# Altium PCB PCB_ProtoDuck_v1_2026-05-04.pcbdoc (part 1 of 2)
Units mm, origin at the board's own origin, x right, y up, seen from the top; angles counter-clockwise.
Board outline 75.65 x 110.65 mm, 2 copper layers (Top Layer, Bottom Layer); 76 components, 84 nets, 372 pads, 186 vias.
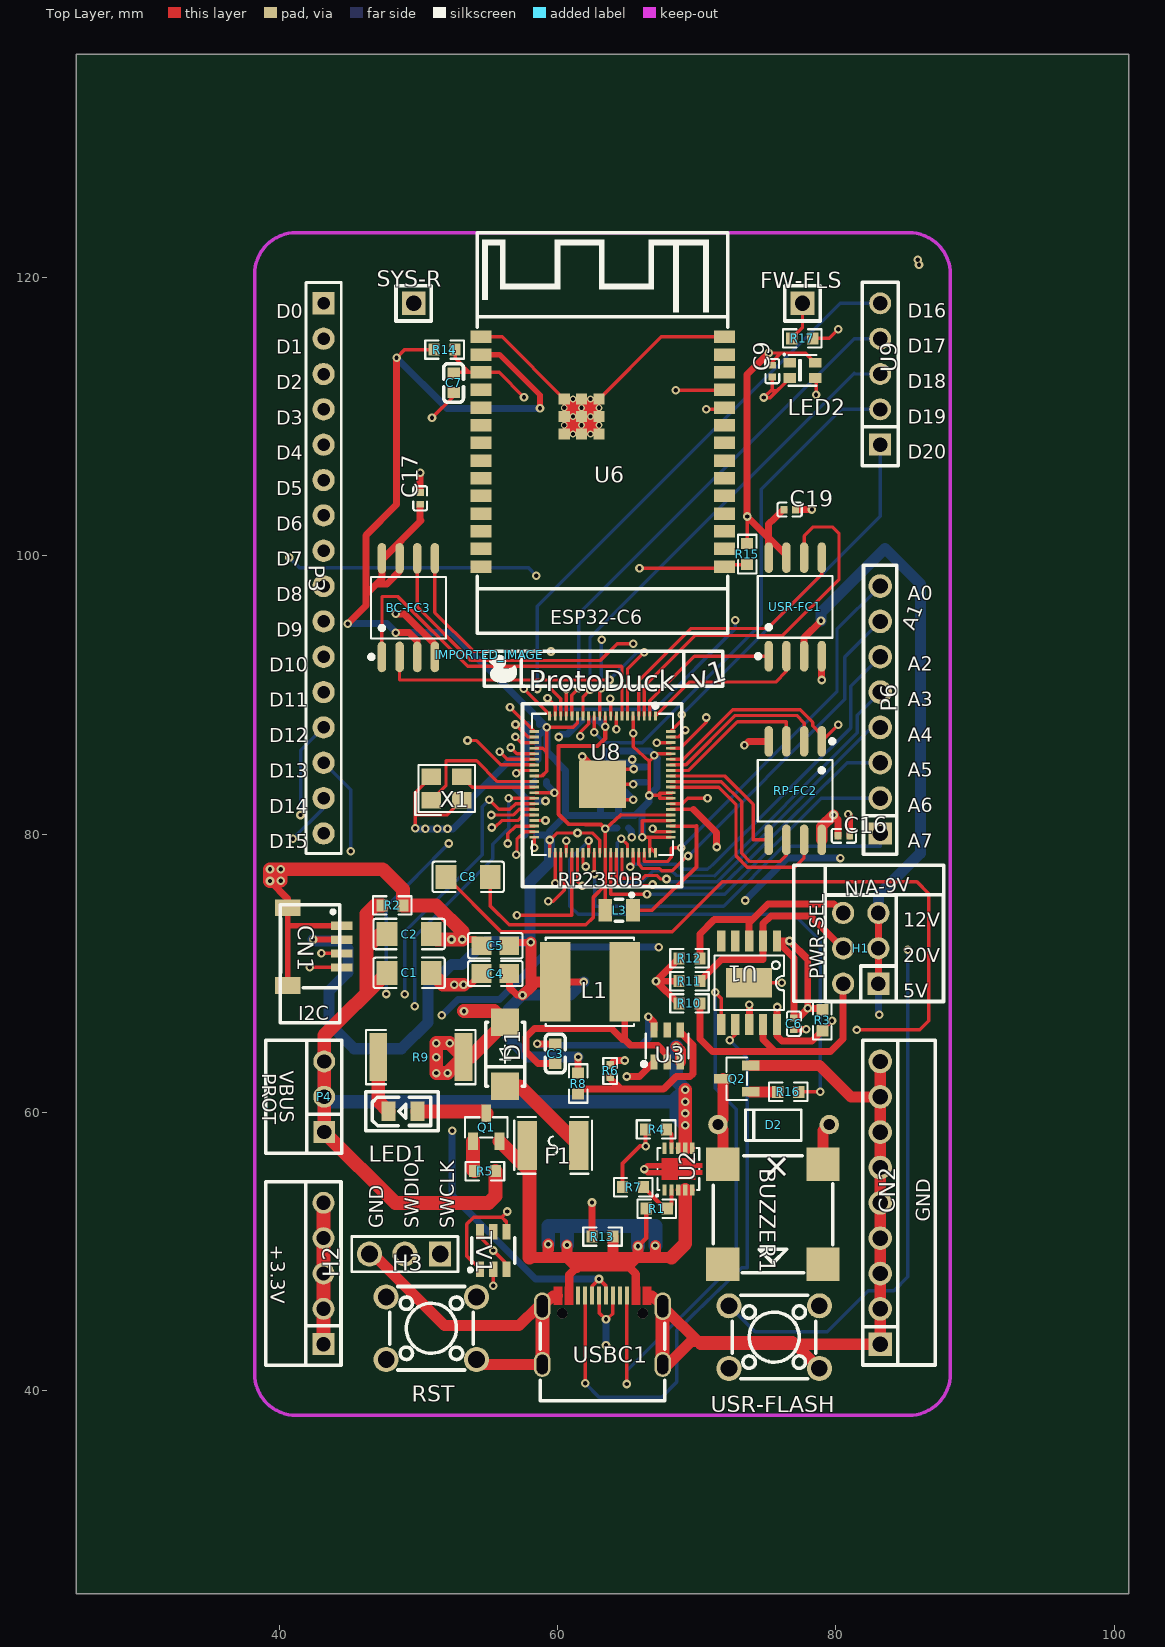
[diagram p0: Top Layer view]
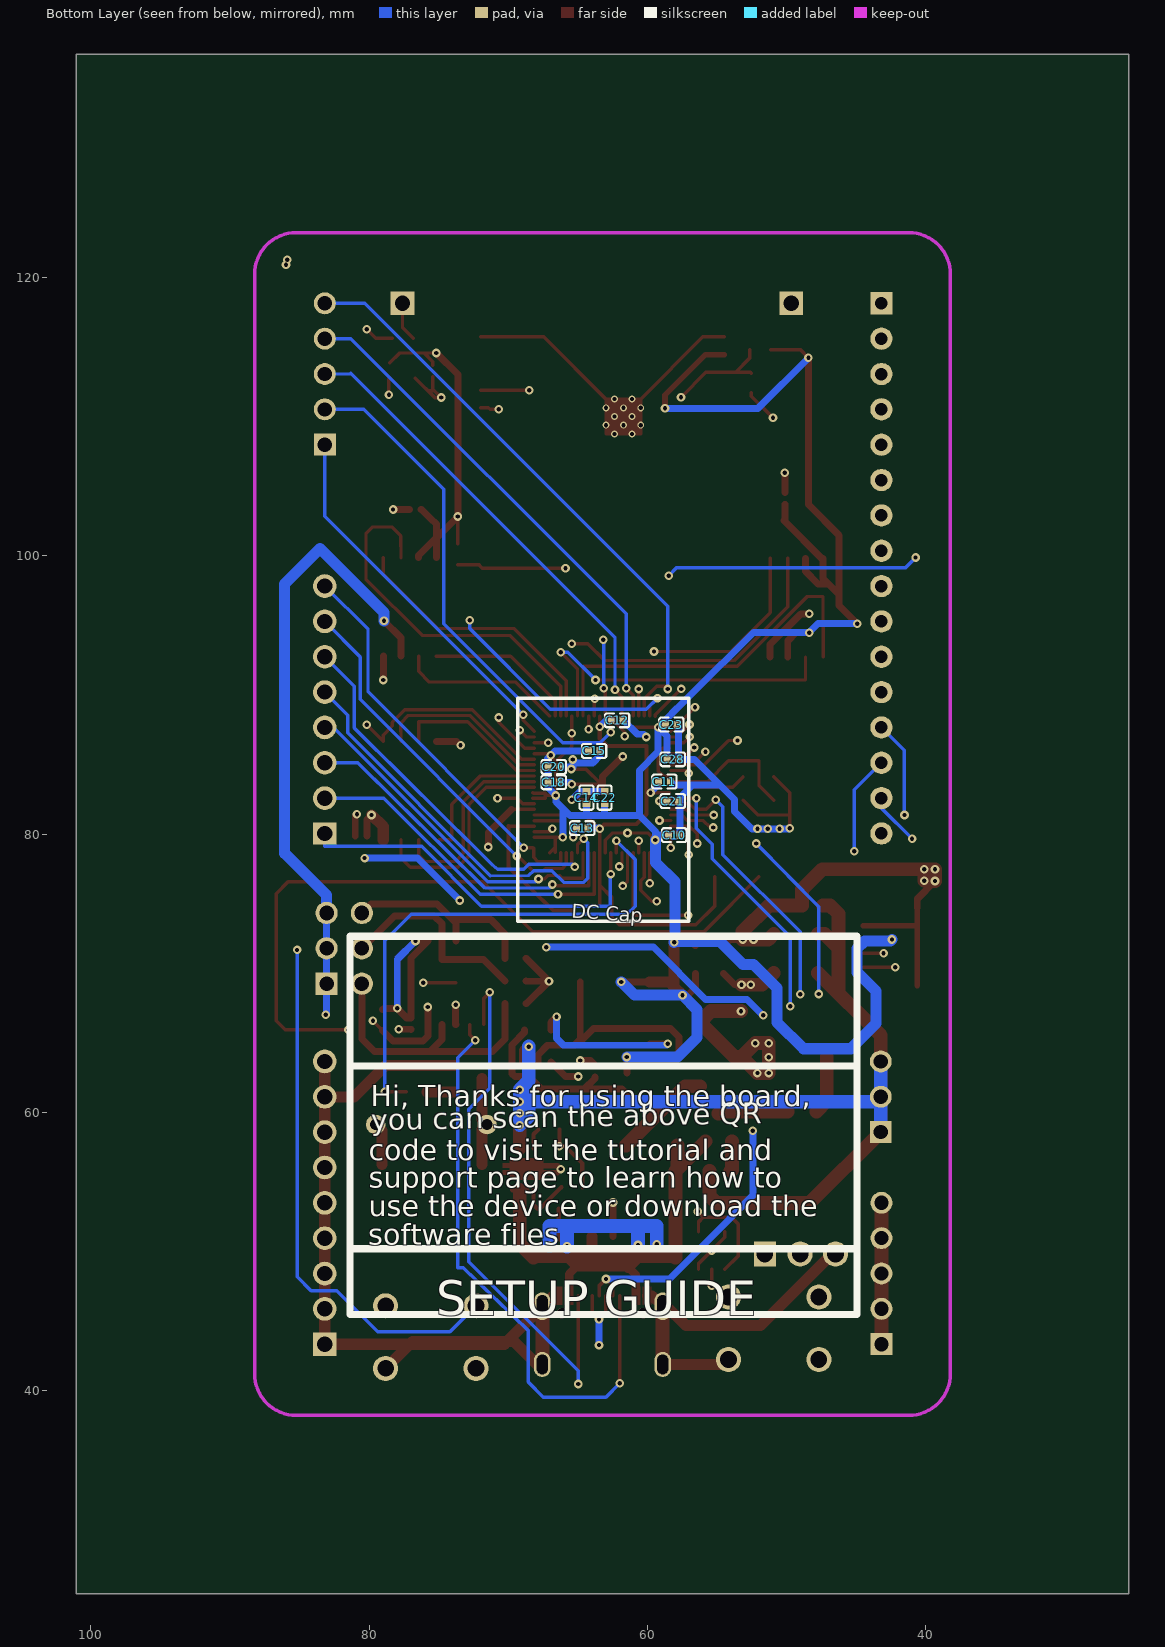
[diagram p1: Bottom Layer view, seen from below]

## Layer stack, top to bottom
Top Layer: signal copper (thickness not stored)
Dielectric: dielectric 0.32, FR-4, Dk 4.8
Bottom Layer: signal copper (thickness not stored)

## Board outline
101.054,25.4 25.4,25.4 25.4,136.054 101.054,136.054

## Components (designator, comment, footprint, x,y, rotation, side; value= is the part's Value field where it differs from the comment)
BC-FC3 "GD25Q128ESIGR" SOP-8_L5.3-W5.3-P1.27-LS8.0-BL 49.277,96.277 r0 top
BUZZER1 "2700Hz" BUZ-SMD_4P-L8.5-W8.5-P8.50-TL 75.477,52.677 r270 top
C1 "10uF" C1206 49.327,70.027 r180 top
C2 "10uF" C1206 49.327,72.821 r180 top
C3 "100nF" C0603 59.827,64.227 r90 top
C4 "22uF" C0805 55.527,69.977 r0 top
C5 "22uF" C0805 55.527,71.977 r0 top
C6 "100nF" C0402#1 76.977,66.377 r90 top
C7 "1uF" C0603 52.527,112.427 r270 top
C8 "10uF" C1206 53.577,76.927 r0 top
C9 "100nF" C0402#1 75.427,113.277 r90 top
C10 "100nF" C0402#2 58.077,79.927 r0 bottom
C11 "100nF" C0402#2 58.777,83.777 r0 bottom
C12 "100nF" C0402#2 62.177,88.177 r0 bottom
C13 "100nF" C0402#2 64.677,80.427 r180 bottom
C14 "100nF" C0402#2 64.377,82.627 r270 bottom
C15 "100nF" C0402#2 63.827,85.977 r0 bottom
C16 "100nF" C0402#1 80.577,79.877 r0 top
C17 "100nF" C0402#1 50.127,104.127 r90 top
C18 "100nF" C0402#2 66.727,83.727 r0 bottom
C19 "100nF" C0402#1 76.677,103.327 r0 top
C20 "100nF" C0402#2 66.727,84.827 r0 bottom
C21 "100nF" C0402#2 58.177,82.377 r0 bottom
C22 "100nF" C0402#2 63.077,82.627 r270 bottom
C23 "100nF" C0402#2 58.277,87.877 r0 bottom
C28 "10uF" C0402#2 58.177,85.377 r0 bottom
CN1 "SM04B-SRSS-TB (LF)(SN)" CONN-SMD_4P-P1.00_SM04B-SRSS-TB-LF-SN 42.545,71.919 r270 top
CN2 "HX PM2.54-1X9P ZC-Y" HDR-TH_9P-P2.54-V-F-1 83.185,53.5 r90 top
D1 "SMAJ22A_C51045908" DO-214AC_L4.3-W2.7-LS5.3-RD 56.227,64.177 r90 top
D2 "1N4148_C18195411" DO-35_BD2.2-L4.0-D0.50_1N4148 75.527,59.127 r180 top
F1 "JK-MSMD050-30" F1812 59.677,57.627 r0 top
FW-FLS "Header-Male-2.54_1x1" HDR-TH_1P-P2.54-V-M 77.597,118.147 r0 top
H1 "2.54-2*3" HDR-TH_6P-P2.54-V-R2-C3-S2.54_A2541WV-2X3P 81.788,71.792 r90 top
H2 "Header-Female-2.54_1x5" HDR-TH_5P-P2.54-V-F 43.18,48.424 r90 top
H3 "Header-Male-2.54_1x3" HDR-TH_3P-P2.54-V-M-1 49.022,49.821 r180 top
IMPORTED_IMAGE "IMPORTED_IMAGE" IMPORTED_IMAGE 55.082,92.878 r0 top
L1 "4.7uH" IND-SMD_L6.0-W6.0 62.327,69.377 r180 top
L3 "3.3uH" IND-SMD_L2.0-W1.6_AOTA-B201610S3R3-101-T 64.427,74.527 r0 top
LED1 "17-21VRD/TR8" LED0805-R-RD 48.889,60.076 r0 top
LED2 "WS2812C-2020-V1" LED-SMD_4P-L2.0-W2.0-TL_WS2812B-2020 77.598,113.322 r0 top
P3 "Header-Female-2.54_1x16" HDR-TH_16P-P2.54-V-F-1 43.18,99.097 r270 top
P4 "Header-Female-2.54_1x3" HDR-TH_3P-P2.54-V-F 43.227,61.124 r90 top
P6 "Header-Female-2.54_1x8" HDR-TH_8P-P2.54-V-F 83.185,88.937 r90 top
Q1 "MMBT3906_C51953475" SOT-23-3_L2.9-W1.3-P1.90-LS2.4-BR 54.877,58.927 r270 top
Q2 "S8050_C51953468" SOT-23-3_L2.9-W1.3-P1.90-LS2.4-BR 72.877,62.427 r0 top
R1 "47kΩ" R0603 67.127,53.077 r180 top
R2 "10kΩ" R0603 48.127,74.877 r180 top
R3 "10kΩ" R0603 79.027,66.627 r90 top
R4 "33kΩ" R0603 67.077,58.777 r0 top
R5 "100kΩ" R0603 54.777,55.777 r0 top
R6 "22kΩ" R0402 63.777,62.977 r90 top
R7 "20kΩ" R0603 65.427,54.627 r0 top
R8 "100kΩ" R0603 61.477,62.077 r90 top
R9 "1.5kΩ" R2512 50.177,63.977 r180 top
R10 "10kΩ" R0603 69.477,67.827 r0 top
R11 "10kΩ" R0603 69.477,69.432 r0 top
R12 "10kΩ" R0603 69.477,71.077 r0 top
R13 "1kΩ" R0603 63.227,51.077 r0 top
R14 "10kΩ" R0603 51.877,114.827 r0 top
R15 "10kΩ" R0603 73.627,100.127 r270 top
R16 "1kΩ" R0603 76.577,61.477 r0 top
R17 "1kΩ" R0603 77.577,115.627 r0 top
RP-FC2 "GD25Q128ESIGR" SOP-8_L5.3-W5.3-P1.27-LS8.0-BL 77.077,83.127 r180 top
RST "TS665CJ" SW-TH_4P-L6.0-W6.0-P4.50-LS6.5 50.927,44.487 r0 top
SYS-R "Header-Male-2.54_1x1" HDR-TH_1P-P2.54-V-M 49.657,118.147 r0 top
TV1 "SRV05-4-P-T7" SOT-23-6_L2.9-W1.6-P0.95-LS2.8-BR 55.377,50.077 r270 top
U1 "CH224K" ESSOP-10_L4.9-W3.9-P1.0-LS6.0-TL-EP 73.767,69.317 r180 top
U2 "TPS259271DRCR" VSON-10_L3.0-W3.0-P0.50-TL-EP 68.677,55.927 r90 top
U3 "TPS54302DDCR_C311983" SOT-23-6_L2.9-W1.6-P0.95-LS2.8-BL 67.877,64.777 r0 top
U6 "ESP32-C6-WROOM-1-N8" WIRELM-SMD_ESP32-C6-WROOM-1 63.233,107.477 r0 top
U8 "RP2350B_C42415655" QFN-80_L10.0-W10.0-P0.40-TL-EP3.4 63.227,83.577 r270 top
U9 "BX-PM2.54-1-5PY" HDR-TH_5P-P2.54-V-F-B 83.185,113.067 r90 top
USBC1 "TYPE-C-31-M-12" USB-C_SMD-TYPE-C-31-M-12_1 63.227,44.36 r0 top
USR-FC1 "GD25Q128ESIGR" SOP-8_L5.3-W5.3-P1.27-LS8.0-BL 77.077,96.327 r0 top
USR-FLASH "TS665CJ" SW-TH_4P-L6.0-W6.0-P4.50-LS6.5 75.565,43.852 r0 top
X1 "12MHz" CRYSTAL-SMD_4P-L3.2-W2.5-BL 52.027,83.277 r0 top

## Footprints (in the part's own frame and the unit in brackets; to place one, negate y for a bottom-side part, rotate by r counter-clockwise, add the part's x,y. Pads: shape width x height; smd on the part's side, far side on the other; paste and mask are expansions set on the pad)
BUZ-SMD_4P-L8.5-W8.5-P8.50-TL [mm]
  rect 2.4x2.4 smd paste+0 mask+0.051: 1(-3.6,3.6) 2(-3.6,-3.6) 3(3.599,-3.6) 4(3.6,3.6)
  silkscreen extent -4.2,-4.3 4.2,4.3
C0402#1 [mm]
  rect 0.5x0.54 smd paste+0 mask+0.051: 1(-0.42,0) 2(0.42,0)
  silkscreen extent -0.87,-0.5 0.87,0.5
C0402#2 [mm]
  rect 0.5x0.54 smd paste+0 mask+0.051: 1(0.42,0) 2(-0.42,0)
  silkscreen extent -0.87,-0.5 0.87,0.5
C0603 [mm]
  rect 0.8x0.9 smd paste+0 mask+0.051: 1(-0.7,0) 2(0.7,0)
  silkscreen extent -1.39,-0.71 1.39,0.71
C0805 [mm]
  rect 1.41x1.35 smd paste-100 mask+0.051: 1(-1,0) 2(1,0)
  silkscreen extent -1.96,-0.9 1.96,0.9
C1206 [mm]
  rect 1.485x1.728 smd paste-100 mask+0.051: 1(-1.593,0) 2(1.593,0)
  silkscreen extent -2.56,-1.09 2.56,1.09
CONN-SMD_4P-P1.00_SM04B-SRSS-TB-LF-SN [mm]
  rect 0.6x1.55 smd paste+0 mask+0.051: 1(-1.5,1.938) 2(-0.5,1.938) 3(0.501,1.938) 4(1.5,1.938)
  rect 1.2x1.8 smd paste+0 mask+0.051: 5(2.8,-1.938) 6(-2.8,-1.938)
  silkscreen extent -3.02,-2.46 2.96,1.8
CRYSTAL-SMD_4P-L3.2-W2.5-BL [mm]
  rect 1.4x1.2 smd paste+0 mask+0.051: 1(-1.1,-0.85) 2(1.1,-0.85) 3(1.1,0.85) 4(-1.1,0.85)
  silkscreen extent -2.26,-1.91 2.03,1.68
DO-35_BD2.2-L4.0-D0.50_1N4148 [mm]
  round 1.4 hole 0.8 paste+0 mask+0.05: 1(-4,0) 2(4,0)
  silkscreen extent -1.98,-1.06 2.02,1.14
DO-214AC_L4.3-W2.7-LS5.3-RD [mm]
  rect 2x2 smd paste+0 mask+0.051: 1(-2.3,0) 2(2.3,0)
  silkscreen extent -2.3,-1.4 2.3,1.4
ESSOP-10_L4.9-W3.9-P1.0-LS6.0-TL-EP [mm]
  rect 0.6x1.5 smd paste+0 mask+0.05: 1(-2,-3) 2(-1,-3) 3(0,-3) 4(1,-3) 5(2,-3) 6(2,3) 7(1,3) 8(0,3) 9(-1,3) 10(-2,3)
  rect 3.3x2.1 smd paste+0 mask+0.05: 11(0,0)
  silkscreen extent -2.5,-1.95 2.5,1.95
F1812 [mm]
  rect 1.407x3.499 smd paste-100 mask+0.051: 1(-1.853,0) 2(1.853,0)
  silkscreen extent -2.79,-2.03 2.79,2.03
HDR-TH_1P-P2.54-V-M [mm]
  rect 1.7x1.7 hole 1.1 paste+0 mask+0.051: 1(0,0)
  silkscreen extent -1.27,-1.27 1.27,1.27
HDR-TH_3P-P2.54-V-F [mil]
  rect 62x62 hole 40.16 paste+0 mask+2: 1(-100,0)
  round 62 hole 40.16 paste+0 mask+2: 2(0,0) 3(100,0)
  silkscreen extent -160,-49 160,49
HDR-TH_3P-P2.54-V-M-1 [mm]
  rect 1.575x1.8 hole 1.2 paste+0 mask+0.051: 1(-2.54,0)
  round 1.8 hole 1.2 paste+0 mask+0.051: 2(0,0) 3(2.54,0)
  silkscreen extent -3.81,-1.27 3.81,1.27
HDR-TH_5P-P2.54-V-F [mil]
  rect 62x62 hole 40.16 paste+0 mask+2: 1(-200,0)
  round 62 hole 40.16 paste+0 mask+2: 2(-100,0) 3(0,0) 4(100,0) 5(200,0)
  silkscreen extent -260,-50 260,50
HDR-TH_5P-P2.54-V-F-B [mil]
  rect 62x62 hole 40.16 paste+0 mask+2: 1(-200,0)
  round 62 hole 40.16 paste+0 mask+2: 2(-100,0) 3(0,0) 4(100,0) 5(200,0)
  silkscreen extent -260,-51 260,51
HDR-TH_6P-P2.54-V-R2-C3-S2.54_A2541WV-2X3P [mm]
  rect 1.6x1.6 hole 1.05 paste+0 mask+0.051: 1(-2.54,-1.27)
  round 1.6 hole 1.05 paste+0 mask+0.051: 2(-2.54,1.27) 3(0,-1.27) 4(0,1.27) 5(2.54,-1.27) 6(2.54,1.27)
  silkscreen extent -3.81,-2.54 3.81,2.54
HDR-TH_8P-P2.54-V-F [mm]
  rect 1.575x1.7 hole 1.1 paste+0 mask+0.051: 1(-8.89,0)
  round 1.7 hole 1.1 paste+0 mask+0.051: 2(-6.35,0) 3(-3.81,0) 4(-1.27,0) 5(1.27,0) 6(3.81,0) 7(6.35,0) 8(8.89,0)
  silkscreen extent -10.4,-1.2 10.4,1.2
HDR-TH_9P-P2.54-V-F-1 [mm]
  rect 1.7x1.7 hole 1.1 paste+0 mask+0.051: 1(-10.16,0)
  round 1.7 hole 1.1 paste+0 mask+0.051: 2(-7.62,0) 3(-5.08,0) 4(-2.54,0) 5(0,0) 6(2.54,0) 7(5.08,0) 8(7.62,0) 9(10.16,0)
  silkscreen extent -11.68,-1.25 11.68,1.25
HDR-TH_16P-P2.54-V-F-1 [mm]
  rect 1.6x1.6 hole 0.9 paste+0 mask+0.051: 1(-19.05,0)
  round 1.6 hole 0.9 paste+0 mask+0.051: 2(-16.51,0) 3(-13.97,0) 4(-11.43,0) 5(-8.89,0) 6(-6.35,0) 7(-3.81,0) 8(-1.27,0) 9(1.27,0) 10(3.81,0) 11(6.35,0) 12(8.89,0) 13(11.43,0) 14(13.97,0) 15(16.51,0) 16(19.05,0)
  silkscreen extent -20.55,-1.27 20.5,1.27
IMPORTED_IMAGE [mm]
  silkscreen extent 0,-2 2,0
IND-SMD_L2.0-W1.6_AOTA-B201610S3R3-101-T [mm]
  rect 1x1.6 smd paste+0 mask+0.05: 1(-1,0) 2(1,0)
  silkscreen extent -0.27,-0.8 1.03,1.23
IND-SMD_L6.0-W6.0 [mm]
  rect 2.2x5.72 smd paste+0 mask+0.051: 1(-2.5,0) 2(2.5,0)
  silkscreen extent -3.18,-3.18 3.18,3.18
LED0805-R-RD [mm]
  rect 1x1.4 smd paste+0 mask+0.051: 1(1.05,0) 2(-1.05,0)
  silkscreen extent -2.22,-1.04 1.99,1.01
LED-SMD_4P-L2.0-W2.0-TL_WS2812B-2020 [mm]
  rect 0.9x0.7 smd paste+0 mask+0.051: 1(-0.915,0.55) 2(-0.915,-0.55) 3(0.915,-0.55) 4(0.915,0.55)
  silkscreen extent -1.3,-1.1 1,1.15
QFN-80_L10.0-W10.0-P0.40-TL-EP3.4 [mm]
  rect 0.665x0.2 smd paste+0 mask+0.05: 1(-4.907,3.8) 2(-4.907,3.4) 3(-4.907,3) 4(-4.907,2.6) 5(-4.907,2.2) 6(-4.907,1.8) 7(-4.907,1.4) 8(-4.907,1) 9(-4.907,0.6) 10(-4.907,0.2) 11(-4.907,-0.2) 12(-4.907,-0.6) 13(-4.907,-1) 14(-4.907,-1.4) 15(-4.907,-1.8) 16(-4.907,-2.2) 17(-4.907,-2.6) 18(-4.907,-3) 19(-4.907,-3.4) 20(-4.907,-3.8) 41(4.907,-3.8) 42(4.907,-3.4) 43(4.907,-3) 44(4.907,-2.6) 45(4.907,-2.2) 46(4.907,-1.8) 47(4.907,-1.4) 48(4.907,-1) 49(4.907,-0.6) 50(4.907,-0.2) 51(4.907,0.2) 52(4.907,0.6) 53(4.907,1) 54(4.907,1.4) 55(4.907,1.8) 56(4.907,2.2) 57(4.907,2.6) 58(4.907,3) 59(4.907,3.4) 60(4.907,3.8)
  rect 0.2x0.665 smd paste+0 mask+0.05: 21(-3.8,-4.907) 22(-3.4,-4.907) 23(-3,-4.907) 24(-2.6,-4.907) 25(-2.2,-4.907) 26(-1.8,-4.907) 27(-1.4,-4.907) 28(-1,-4.907) 29(-0.6,-4.907) 30(-0.2,-4.907) 31(0.2,-4.907) 32(0.6,-4.907) 33(1,-4.907) 34(1.4,-4.907) 35(1.8,-4.907) 36(2.2,-4.907) 37(2.6,-4.907) 38(3,-4.907) 39(3.4,-4.907) 40(3.8,-4.907) 61(3.8,4.907) 62(3.4,4.907) 63(3,4.907) 64(2.6,4.907) 65(2.2,4.907) 66(1.8,4.907) 67(1.4,4.907) 68(1,4.907) 69(0.6,4.907) 70(0.2,4.907) 71(-0.2,4.907) 72(-0.6,4.907) 73(-1,4.907) 74(-1.4,4.907) 75(-1.8,4.907) 76(-2.2,4.907) 77(-2.6,4.907) 78(-3,4.907) 79(-3.4,4.907) 80(-3.8,4.907)
  rect 3.4x3.4 smd paste+0 mask+0.05: 81(0,0)
  silkscreen extent -5.81,-5.08 5.08,5.08
R0402 [mm]
  rect 0.566x0.54 smd paste-100 mask+0.051: 1(-0.433,0) 2(0.433,0)
  silkscreen extent -0.94,-0.5 0.94,0.5
R0603 [mm]
  rect 0.806x0.864 smd paste-100 mask+0.051: 1(-0.753,0) 2(0.753,0)
  silkscreen extent -1.39,-0.66 1.39,0.66
R2512 [mm]
  rect 1.283x3.456 smd paste-100 mask+0.051: 1(-3.066,0) 2(3.066,0)
  silkscreen extent -3.94,-1.96 3.94,1.96
SOP-8_L5.3-W5.3-P1.27-LS8.0-BL [mm]
  oval 0.609x2.204 smd paste+0 mask+0.051: 1(-1.905,-3.542) 2(-0.635,-3.542) 3(0.635,-3.542) 4(1.905,-3.542) 5(1.905,3.542) 6(0.635,3.542) 7(-0.635,3.542) 8(-1.905,3.542)
  silkscreen extent -2.81,-3.69 2.69,2.21
SOT-23-3_L2.9-W1.3-P1.90-LS2.4-BR [mm]
  rect 1.25x0.7 smd paste+0 mask+0.051: 1(1,-0.95) 2(1,0.95) 3(-1,0)
  silkscreen extent -0.73,-1.53 0.73,1.53
SOT-23-6_L2.9-W1.6-P0.95-LS2.8-BL [mm]
  rect 0.532x1.072 smd paste+0 mask+0.051: 1(-0.95,-1.149) 2(0,-1.149) 3(0.95,-1.149) 4(0.95,1.149) 5(0,1.149) 6(-0.95,1.149)
  silkscreen extent -1.82,-1.45 1.54,0.89
SOT-23-6_L2.9-W1.6-P0.95-LS2.8-BR [mm]
  rect 1.1x0.6 smd paste+0 mask+0.051: 1(1.35,-0.95) 2(1.35,0) 3(1.35,0.95) 4(-1.35,0.95) 5(-1.35,0) 6(-1.35,-0.95)
  silkscreen extent -0.9,-1.78 1.52,1.55
SW-TH_4P-L6.0-W6.0-P4.50-LS6.5 [mm]
  round 1.8 hole 1.2 paste+0 mask+0.051: 1(-3.25,2.25) 2(3.25,2.25) 3(-3.25,-2.25) 4(3.25,-2.25)
  silkscreen extent -3,-3 3,3
USB-C_SMD-TYPE-C-31-M-12_1 [mm]
  oval 1.2x2 hole 0.8 slot 1.6 at 90 deg paste+0 mask+0.051: 1(4.325,1.706) 4(-4.325,1.706)
  oval 1.2x1.8 hole 0.8 slot 1.4 at 90 deg paste+0 mask+0.051: 2(4.325,-2.474) 3(-4.325,-2.474)
  rect 0.3x1.3 smd paste-100 mask+0.051: A5(-1.25,2.474) A6(-0.25,2.474) A7(0.25,2.474) A8(1.25,2.474) B5(1.75,2.474) B6(0.75,2.474) B7(-0.75,2.474) B8(-1.75,2.474)
  round 0.75 hole 0.75 unplated paste+0: ""(-2.9,1.205) ""(2.9,1.205)
  Top Layer region: -2.9,1.824 -2.9,3.124 -2.9,3.124 -3.2,3.124 -3.2,3.124 -3.2,3.124 -3.2,3.124 -3.5,3.124 -3.5,3.124 -3.5,1.824 -3.5,1.824 -3.2,1.824 -3.2,1.824 -3.2,1.824 -3.2,1.824
  Top Layer region: 2.9,3.124 2.9,1.824 2.9,1.824 3.2,1.824 3.2,1.824 3.2,1.824 3.2,1.824 3.5,1.824 3.5,1.824 3.5,3.124 3.5,3.124 3.2,3.124 3.2,3.124 3.2,3.124 3.2,3.124
  Top Layer region: 2.7,1.824 2.7,3.124 2.7,3.124 2.4,3.124 2.4,3.124 2.4,3.124 2.4,3.124 2.1,3.124 2.1,3.124 2.1,1.824 2.1,1.824 2.4,1.824 2.4,1.824 2.4,1.824 2.4,1.824
  Top Layer region: -2.1,1.824 -2.1,3.124 -2.1,3.124 -2.4,3.124 -2.4,3.124 -2.4,3.124 -2.4,3.124 -2.7,3.124 -2.7,3.124 -2.7,1.824 -2.7,1.824 -2.4,1.824 -2.4,1.824 -2.4,1.824 -2.4,1.824
  silkscreen extent -4.47,-5.09 4.47,0.49
VSON-10_L3.0-W3.0-P0.50-TL-EP [mm]
  rect 0.8x0.3 smd paste+0 mask+0.051: 1(-1.5,1) 2(-1.5,0.5) 3(-1.5,0) 4(-1.5,-0.5) 5(-1.5,-1) 6(1.5,-1) 7(1.5,-0.5) 8(1.5,0) 9(1.5,0.5) 10(1.5,1)
  Top Layer region: -0.758,1.191 -0.398,1.191 -0.398,1.706 -0.098,1.706 -0.098,1.191 0.102,1.191 0.102,1.706 0.402,1.706 0.402,1.191 0.761,1.191 0.761,-1.209 0.402,-1.209 0.402,-1.714 0.102,-1.714 0.102,-1.209 -0.098,-1.209 -0.098,-1.714 -0.398,-1.714 -0.398,-1.209 -0.759,-1.209 -0.759,0.886 -0.758,0.886 -0.758,0.886 -0.758,0.886
  silkscreen extent -1.98,-1.5 1.5,1.6
WIRELM-SMD_ESP32-C6-WROOM-1 [mm]
  rect 1.5x0.9 smd paste+0 mask+0.05: 1(-8.75,8.255) 2(-8.75,6.985) 3(-8.75,5.715) 4(-8.75,4.445) 5(-8.75,3.175) 6(-8.75,1.905) 7(-8.75,0.635) 8(-8.75,-0.635) 9(-8.75,-1.905) 10(-8.75,-3.175) 11(-8.75,-4.445) 12(-8.75,-5.715) 13(-8.75,-6.985) 14(-8.75,-8.255) 15(8.75,-8.255) 16(8.75,-6.985) 17(8.75,-5.715) 18(8.75,-4.445) 19(8.75,-3.175) 20(8.75,-1.905) 21(8.75,-0.635) 22(8.75,0.635) 23(8.75,1.905) 24(8.75,3.175) 25(8.75,4.445) 26(8.75,5.715) 27(8.75,6.985) 28(8.75,8.255)
  rect 0.8x0.8 smd paste+0 mask+0.05: 29(-2.755,3.785) 30(-1.505,3.785) 31(-0.255,3.785) 32(-0.255,2.535) 33(-1.505,2.535) 34(-2.755,2.535) 35(-2.755,1.285) 36(-1.505,1.285) 37(-0.255,1.285)
  silkscreen extent -9,-9.84 9,15.74

## Via types
v1: diameter 0.62, hole 0.31, Top Layer to Bottom Layer, tented both sides, 174 vias
v2: diameter 0.5, hole 0.3, Top Layer to Bottom Layer, tented both sides, 12 vias

## Nets (pads, with @x,y where several pads share a name; then routed paths per layer and width w, separated by ;. In a path a pad name is that pad's centre, name@x,y a point inside that pad or via, vN(x,y) a via of type N, cw(c..) or ccw(c..) an arc to the next point about the centre after c; other vN are vias at no path point)
+3.3V: BC-FC3.3 BC-FC3.7 BC-FC3.8 BUZZER1.1 C4.2 C5.2 C6.2 C9.2 C10.1 C14.1 C15.1 C16.1 C17.1 C18.1 C19.1 C20.1 C21.1 C22.1 C23.1 C28.1 CN1.2 D2.1 H1.1 H1.3 H1.5 H2.1 H2.2 H2.3 H2.4 H2.5 L1.2 LED2.4 R3.2 R8.2 R14.1 R15.1 RP-FC2.8 U1.1 U6.2 U8.5 U8.15 U8.24 U8.29 U8.41 U8.50 U8.59 U8.60 U8.61 U8.64 U8.68 U8.69 U8.76 USR-FC1.3 USR-FC1.7 USR-FC1.8 | length 493.4
  Top Layer w0.23: U8.59@66.627,78.669 66.627,79.777 U8.61@68.135,79.777
  Top Layer w0.24: v1(59.227,87.677) 61.127,87.677 61.427,87.977 U8.15@61.427,88.484 ; v1@59.426,79.577 59.926,80.077 v1(61.427,80.077) 62.528,80.077 62.652,79.953 ; 62.651,79.953 63.027,79.577 U8.50@63.027,78.669 ; v1@66.077,79.777 66.627,79.777 ; 66.576,85.226 67.127,85.777 U8.76@68.135,85.777 ; 66.627,79.064 U8.60@67.027,78.669 ; v1(75.177,114.577) 77.808,114.577 LED2.4@78.513,113.872
  Top Layer w0.25: v1(48.427,114.227) 49.027,114.827 R14.1@51.124,114.827 ; U8.29@58.419,84.177 58.877,84.177 59.227,84.527 59.227,85.877 ; U8.24@58.419,86.177 58.927,86.177 59.227,85.877 ; v1(59.227,87.677) 59.227,85.877 ; U8.41@59.427,78.677 v1(59.427,79.577) ; U8.5@65.427,88.484 v1(65.427,87.258) 65.427,86.277 66.576,85.226 v1(66.577,82.777) ; v1@66.078,79.778 66.078,80.976 U8.64@68.135,80.976 ; v1(66.577,82.777) 67.295,82.777 67.327,82.745 ; U8.68@68.235,82.577 67.327,82.577 67.327,82.927 68.185,82.927 U8.69@68.235,82.977 ; R15.1@73.627,100.88 v1(73.627,102.827) ; C9.2@75.427,113.697 75.427,113.952 76.051,114.577
  Top Layer w0.4: v1@42.427,72.427 44.475,72.427 CN1.2@44.483,72.419 ; U6.2@54.483,114.462 55.826,114.462 58.733,111.554 v1(58.733,110.604)
  Top Layer w0.5: v1(44.927,95.127) 46.227,96.427 46.227,101.477 48.427,103.677 v1(48.427,114.227) ; 46.227,97.22 46.984,97.977 ; v1(48.377,94.477) 49.327,94.477 49.912,93.892 BC-FC3.3@49.912,92.735 ; BC-FC3.7@48.642,99.819 48.642,98.892 47.727,97.977 46.984,97.977 ; C17.1@50.127,103.707 50.127,102.577 50.177,102.527 47.469,99.819 BC-FC3.8@47.372,99.819 47.372,98.365 46.984,97.977 ; C4.2@56.527,69.977 56.527,68.977 57.077,68.427 v1(57.477,68.427) ; C5.2@56.527,71.977 56.777,72.227 v1(58.077,72.227) ; L1.2@59.827,69.377 v1(61.877,69.377) ; R8.2@61.477,62.83 v1(61.477,63.977) ; v1(75.177,114.577) 73.627,113.027 v1(73.627,102.827) ; C19.1@76.257,103.327 76.227,103.327 75.577,102.677 75.172,102.272 USR-FC1.8@75.172,99.869 75.172,101.282 v1(73.627,102.827) ; USR-FC1.7@76.442,99.869 76.442,100.012 v1(73.627,102.827) ; USR-FC1.3@77.712,92.785 77.712,94.112 v1(78.927,95.327) ; R3.2@79.027,67.38 78.93,67.477 v1(77.977,67.477) ; v1(79.827,81.377) 80.157,81.047 C16.1@80.157,79.877 ; H1.1@83.058,69.252 H1.5@83.058,74.332 ; v1(77.977,67.477) 77.297,66.797 C6.2@76.977,66.797 76.977,71.107 U1.1@75.767,72.317 v1(76.667,72.317) 77.977,71.006 v1(77.977,67.477)
  Top Layer w0.8: v1(57.477,68.427) 58.077,69.027 ; v1(58.077,72.227) 58.077,69.027 ; L1.2@59.827,69.377 58.427,69.377 58.077,69.027 ; RP-FC2.8@78.982,79.585 78.982,80.532 v1(79.827,81.377) ; BUZZER1.1@79.077,56.277 79.077,58.677 D2.1@79.527,59.127
  Top Layer w1: H2.1@43.18,43.344 H2.5@43.18,53.504
  Mid-Layer 1 w0.5: H2.1@43.18,43.344 H2.5@43.18,53.504 ; v1(59.127,82.377) v1(61.427,80.077) ; v1(65.427,87.258) 65.427,87.177 v1(66.94,85.663) ; v1(73.627,102.827) 73.627,100.627 v1(78.927,95.327) ; D2.1@79.527,59.127 80.727,60.327 80.727,62.677 78.927,62.677 76.877,64.727 76.877,66.377 v1(77.977,67.477) 82.677,67.477 v1(83.127,67.027) ; H1.1@83.058,69.252 H1.5@83.058,74.332
  Mid-Layer 1 w0.8: v1(42.427,72.427) 39.777,69.777 39.777,56.907 H2.5@43.18,53.504 ; H2.1@43.18,43.344 47.097,39.427 74.227,39.427 74.227,66.027 74.827,66.627 74.827,70.477 v1(76.667,72.317) ; v1@76.667,72.318 76.667,73.867 78.527,75.726 81.664,75.726 H1.5@83.058,74.332 ; v1(78.927,95.327) 76.577,97.677 73.127,97.677 71.677,96.227 71.677,94.327 73.977,92.027 73.977,88.827 79.827,82.977 v1(79.827,81.377)
  Bottom Layer w0.5: v1(44.927,95.127) 47.727,95.127 v1(48.377,94.477) 52.377,94.477 56.827,90.077 v1(59.227,87.677) 59.228,85.927 60.576,84.576 60.576,81.327 ; v1(48.427,114.227) 52.05,110.604 v1(58.733,110.604) ; 57.859,89.046 58.697,88.208 C23.1@58.697,87.877 ; C10.1@58.497,79.927 59.077,79.927 v1(59.427,79.577) 59.427,80.177 60.577,81.327 ; C21.1@58.597,82.377 v1(59.127,82.377) ; C28.1@58.597,85.377 58.597,87.047 v1(59.227,87.677) ; 63.077,81.327 C22.1@63.077,82.207 ; C15.1@64.247,85.977 66.627,85.977 v1(66.94,85.663) 67.177,85.427 67.147,85.397 C20.1@67.147,84.827 C18.1@67.147,83.727 67.147,83.347 v1(66.577,82.777) ; 64.376,81.327 C14.1@64.376,82.206 ; v1(66.077,79.777) 66.077,81.827 66.577,82.327 ; v1@66.576,82.777 66.576,82.328 65.578,81.327 60.576,81.327 ; v1(76.667,72.317) 77.977,71.006 v1(77.977,67.477) ; H1.5@83.058,74.332 H1.1@83.058,69.252 83.058,67.096 v1(83.127,67.027)
  Bottom Layer w0.8: v1(42.427,72.427) 42.527,72.327 44.377,72.327 44.927,71.777 44.927,70.077 43.577,68.727 43.577,66.377 45.377,64.577 48.777,64.577 50.677,66.477 50.677,68.927 52.377,70.627 53.127,70.627 54.777,72.277 v1@58.027,72.277 ; v1(58.077,72.227) v1@58.027,72.277 ; v1(59.427,79.577) 59.427,77.977 58.027,76.577 v1@58.027,72.277 ; v1(61.477,63.977) 57.827,63.977 56.427,65.377 56.427,67.377 v1(57.477,68.427) 60.927,68.427 v1(61.877,69.377) ; v1(78.927,95.327) 78.927,95.927 83.527,100.527 86.077,97.977 86.077,78.627 83.058,75.608 H1.5@83.058,74.332
BC-FC3_1: BC-FC3.1 U8.7 | length 27.2
  Top Layer w0.24: BC-FC3.1@47.372,92.735 47.377,97.077 48.527,97.077 53.528,92.076 64.577,92.076 64.628,92.028 U8.7@64.627,88.484
BC-FC3_2: BC-FC3.2 U8.6 | length 25.2
  Top Layer w0.24: BC-FC3.2@48.642,92.735 48.641,91.078 v1(63.726,91.078) ; U8.6@65.027,88.484 65.027,91.877 v1(66.227,93.077)
  Bottom Layer w0.25: v1(63.726,91.078) 65.725,93.077 v1(66.227,93.077)
BC-FC3_5: BC-FC3.5 U8.9 | length 21.8
  Top Layer w0.24: BC-FC3.5@51.182,99.819 51.181,95.922 53.976,93.127 v1(59.527,93.127) ; v1(63.777,89.727) 63.827,89.677 U8.9@63.827,88.484
  Mid-Layer 1 w0.24: v1(59.527,93.127) 59.527,90.578 60.376,89.727 v1(63.777,89.727)
BC-FC3_6: BC-FC3.6 U8.8 | length 28.7
  Top Layer w0.24: BC-FC3.6@49.911,99.818 49.911,96.341 53.774,92.478 63.076,92.478 ; v1(64.227,87.527) U8.8@64.227,88.484
  Top Layer w0.25: 63.076,92.478 64.275,93.677 v1(65.427,93.677)
  Mid-Layer 1 w0.24: v1(64.227,87.527) 65.427,88.727 v1(65.427,93.677)
BUZZER1_2: BUZZER1.2 D2.2 Q2.3 | length 6.4
  Top Layer w0.8: BUZZER1.2@71.877,56.277 71.877,58.777 D2.2@71.527,59.127 71.877,59.477 Q2.3@71.877,62.427
D1_1: D1.1 F1.2 | length 7.1
  Top Layer w1: D1.1@56.227,61.877 57.28,61.877 F1.2@61.53,57.627
FW-FLS_1: FW-FLS.1 R17.1 | length 2.8
  Top Layer w0.24: R17.1@76.824,115.627 77.597,116.4 FW-FLS.1@77.597,118.147
GND: BC-FC3.4 C1.1 C2.1 C4.1 C5.1 C6.1 C7.2 C9.1 C10.2 C11.2 C12.2 C13.2 C14.2 C15.2 C16.2 C17.2 C18.2 C19.2 C20.2 C21.2 C22.2 C23.2 C28.2 CN1.1 CN1.5 CN1.6 CN2.1 CN2.2 CN2.3 CN2.4 CN2.5 CN2.6 CN2.7 CN2.8 CN2.9 D1.2 H3.3 LED2.2 Q2.2 R2.1 R4.1 R6.2 R7.1 R9.1 R10.1 R11.1 R12.1 R17.2 RP-FC2.1 RP-FC2.4 RST.4 TV1.2 U1.11 U3.1 U6.1 U6.28 U6.29 U6.30 U6.31 U6.32 U6.33 U6.34 U6.35 U6.36 U6.37 U8.62 U8.75 U8.81 USBC1.1 USBC1.2 USBC1.3 USBC1.4 USR-FC1.4 USR-FLASH.4 X1.2 X1.4 | length 349.2
  Top Layer w0.24: v1(49.777,80.427) 49.777,81.377 ; X1.4@50.927,84.127 49.777,82.977 49.777,81.377 ; X1.2@53.127,82.427 52.077,81.377 49.777,81.377 ; v2(60.479,109.387) v2(62.979,109.387) ; v2(61.104,108.762) v2(61.104,111.262) U6.29@60.478,111.262 ; U6.36@61.728,108.762 U6.30@61.728,111.262 ; v2(62.353,108.762) v2(62.353,111.262) ; U6.32@62.978,110.012 U6.34@60.478,110.012 ; v2(62.979,110.637) v2(61.729,110.637) v2(60.479,110.637) ; v1(66.827,80.377) 67.027,80.177 U8.62@68.135,80.177 ; U8.75@68.135,85.376 69.027,85.376 72.578,88.927 77.427,88.927 78.326,88.025 78.326,87.776 78.982,87.12 RP-FC2.1@78.982,86.669 v1(80.177,87.864) v1@80.177,87.877 ; R17.2@78.33,115.627 79.527,115.627 v1(80.177,116.277) v1@80.227,116.277 ; U6.35@60.478,108.762 U6.34@60.478,110.012 ; U6.35@60.478,108.762 U6.37@62.978,108.762 ; U6.35@60.478,108.762 U6.31@62.978,111.262 ; U6.35@60.478,108.762 U6.29@60.478,111.262 ; U6.35@60.478,108.762 U6.37@62.978,108.762 ; U6.34@60.478,110.012 v2(60.479,110.637) ; v2(60.479,110.637) U6.29@60.478,111.262 ; U6.29@60.478,111.262 U6.31@62.978,111.262 ; U6.29@60.478,111.262 U6.37@62.978,108.762 ; U6.29@60.478,111.262 U6.31@62.978,111.262 ; U6.37@62.978,108.762 U6.31@62.978,111.262 ; U6.37@62.978,108.762 U6.31@62.978,111.262
  Top Layer w0.25: v1(50.977,109.927) 52.527,111.477 C7.2@52.527,111.727 ; U6.1@54.483,115.732 56.008,115.732 U6.29@60.478,111.262 ; U6.31@62.978,111.262 67.449,115.732 U6.28@71.983,115.732 ; v1(65.427,82.477) 64.427,82.477 U8.81@63.327,83.577 ; v1(65.427,83.577) U8.81@63.327,83.577 ; v1(65.477,84.677) 64.427,84.677 U8.81@63.327,83.577 ; C9.1@75.427,112.857 75.427,111.977 v1(74.827,111.377) ; 75.697,111.877 75.327,111.877 v1(74.827,111.377) ; LED2.2@76.683,112.772 75.287,111.377 v1(74.827,111.377)
  Top Layer w0.254: v1(55.377,47.537) TV1.2@55.377,48.727 ; U1.11@73.767,69.317 v1(76.117,69.317)
  Top Layer w0.3: R7.1@64.673,54.627 64.676,56.326 65.926,57.578 v1(66.327,57.577) ; R4.1@66.324,58.777 66.327,58.774 v1(66.327,57.577)
  Top Layer w0.4: CN1.5@40.607,69.119 CN1.6@40.607,74.718 ; 40.607,73.425 CN1.1@44.483,73.42 ; 68.686,55.928 68.436,55.678 66.477,55.678 v1(66.228,55.927) 66.477,56.176 68.438,56.176 68.687,55.93
  Top Layer w0.5: v1(39.327,76.628) 40.607,75.347 CN1.6@40.607,74.719 ; v1(48.377,95.827) 48.977,95.827 51.182,93.622 BC-FC3.4@51.182,92.735 ; C17.2@50.127,104.547 v1(50.127,105.977) ; v1(52.377,72.427) v1(53.158,72.427) 54.077,72.427 C5.1@54.527,71.977 ; v1(52.577,69.177) v1(53.238,69.177) 53.727,69.177 C4.1@54.527,69.977 ; v1(61.777,85.577) 63.227,84.127 U8.81@63.227,83.577 ; R6.2@63.777,63.41 64.094,63.727 v1(64.827,63.727) ; v1@64.977,62.577 65.876,62.577 U3.1@66.927,63.628 ; R10.1@68.724,67.827 68.677,67.827 v1(67.076,69.427) ; R11.1@68.725,69.432 v1(67.076,69.427) ; R12.1@68.725,71.078 v1(67.076,69.427) ; v1(73.427,86.377) 73.719,86.669 RP-FC2.4@75.172,86.669 ; C6.1@76.977,65.957 76.997,65.977 v1(77.877,65.977) ; C19.2@77.097,103.327 v1(78.277,103.327) ; v1(78.982,91.077) USR-FC1.4@78.982,92.785 ; v1(80.877,81.427) 80.997,81.307 C16.2@80.997,79.877
  Top Layer w0.75: USBC1.4@58.902,46.065 59.67,46.834 59.998,46.834 ; 66.482,46.834 66.784,46.834 USBC1.1@67.552,46.065
  Top Layer w0.8: H3.3@46.482,49.821 46.733,49.821 51.877,44.677 57.227,44.677 58.615,46.065 USBC1.4@58.902,46.065 ; RST.4@54.177,42.237 54.528,41.886 USBC1.3@58.902,41.886 ; USBC1.2@67.552,41.886 67.936,41.886 69.577,43.527 76.89,43.527 USR-FLASH.4@78.815,41.602 ; USBC1.1@67.552,46.065 70.277,43.34 CN2.1@83.185,43.34 CN2.9@83.185,63.66 ; Q2.2@73.877,63.377 78.827,63.377 81.084,61.12 CN2.8@83.185,61.12
  Top Layer w1: v1@40.102,77.476 v1(40.102,76.651) v1(39.327,76.628) 39.327,77.476 v1(40.102,77.477) 47.427,77.477 47.627,77.277 48.88,76.024 R2.1@48.88,74.877 51.277,74.877 53.158,72.996 v1(53.158,72.427) 51.314,72.427 C2.1@50.92,72.821 ; C1.1@50.92,70.027 51.77,69.177 v1(53.238,69.177) ; v1(53.277,67.277) 55.427,67.277 D1.2@56.227,66.477 53.727,63.977 R9.1@53.243,63.977 ; USBC1.3@58.902,41.886 USBC1.4@58.902,46.065 ; USBC1.2@67.552,41.886 USBC1.1@67.552,46.065 ; R9.1@53.243,63.977 52.243,64.977 51.277,64.977 v1(51.277,63.967) v1(51.277,62.827) v1(52.093,62.827) R9.1@53.243,63.977
  Mid-Layer 1 w0.24: v1(80.177,87.864) v1(80.177,116.277)
  Bottom Layer w0.5: v1(49.777,80.427) 49.827,80.377 v1(50.501,80.377) v1(51.359,80.377) v1(52.089,80.377) 52.477,80.377 53.727,81.627 53.727,82.477 54.777,83.527 ; C10.2@57.657,79.927 57.657,82.647 56.777,83.527 ; C23.2@57.857,87.877 57.757,87.777 C28.2@57.757,85.377 56.627,85.377 54.777,83.527 ; C11.2@58.357,83.777 58.107,83.527 56.777,83.527 ; v1(60.077,86.977) 60.277,87.177 60.727,87.177 61.727,88.177 C12.2@61.757,88.177 ; C22.2@63.077,83.047 C14.2@64.377,83.047 64.857,83.047 v1(65.427,82.477) ; C15.2@63.407,85.977 63.407,85.647 63.927,85.127 65.118,85.127 v1@65.316,85.325 ; C13.2@65.097,80.427 65.327,80.197 v1(65.327,79.777) ; v1(65.357,85.365) 65.357,84.797 v1(65.477,84.677) 65.627,84.827 C20.2@66.307,84.827 ; v1(65.427,83.577) 65.577,83.727 C18.2@66.307,83.727 ; 54.777,83.527 56.777,83.527
  other v1: 64.977,62.577 51.277,64.977 52.243,64.977 39.327,77.477
  other v2: 61.729,109.387 61.104,110.012 62.353,110.012
LED1_1: LED1.1 Q1.3 | length 5
  Top Layer w1: LED1.1@49.939,60.076 54.727,60.077 Q1.3@54.877,59.927
LED1_2: LED1.2 R9.2 | length 4.2
  Top Layer w1: R9.2@47.111,63.977 47.111,60.806 LED1.2@47.838,60.076
Q1_1: Q1.1 R5.1 | length 2.2
  Top Layer w1: Q1.1@53.927,57.927 53.927,55.874 R5.1@54.024,55.777
Q2_1: Q2.1 R16.1 | length 1.9
  Top Layer w0.8: Q2.1@73.877,61.477 R16.1@75.824,61.477
RP-FC2_2: RP-FC2.2 U8.74 | length 12.6
  Top Layer w0.24: U8.74@68.135,84.977 69.228,84.977 72.776,88.528 77.177,88.527 77.727,87.977 RP-FC2.2@77.712,86.669
RP-FC2_3: RP-FC2.3 U8.73 | length 11.2
  Top Layer w0.24: U8.73@68.135,84.577 69.426,84.576 72.926,88.076 76.441,88.076 RP-FC2.3@76.442,86.669
RP-FC2_5: RP-FC2.5 U8.72 | length 10.2
  Top Layer w0.24: U8.72@68.135,84.177 72.027,84.177 74.072,82.132 74.072,79.585 RP-FC2.5@74.948,79.585
RP-FC2_6: RP-FC2.6 U8.71 | length 14.1
  Top Layer w0.24: U8.71@68.135,83.776 71.778,83.776 73.226,82.328 73.226,78.627 73.826,78.027 75.977,78.027 76.442,78.492 RP-FC2.6@76.442,79.585
RP-FC2_7: RP-FC2.7 U8.70 | length 15.7
  Top Layer w0.24: U8.70@68.135,83.377 71.577,83.377 72.827,82.127 72.827,78.427 73.627,77.627 77.027,77.627 77.712,78.312 RP-FC2.7@77.712,79.585
U1_2: H1.4 R11.2 U1.2 | length 14.7
  Top Layer w0.5: R11.2@70.231,69.432 71.775,70.976 74.767,70.987 U1.2@74.767,72.318 ; U1.2@74.767,72.317 74.767,73.567 75.327,74.127 78.183,74.127 H1.4@80.518,71.792
U1_3: H1.6 R12.2 U1.3 | length 14.8
  Top Layer w0.5: R12.2@70.23,71.077 70.23,72.83 71.258,73.858 74.008,73.858 ; U1.3@73.767,72.317 73.767,73.617 75.127,74.977 79.873,74.977 H1.6@80.518,74.332
U1_6: U1.6 USBC1.B5 | length 40.9
  Top Layer w0.25: v1(64.977,40.477) USBC1.B5@64.977,46.834 ; v1(71.327,68.627) 71.767,68.187 U1.6@71.767,66.317
  Bottom Layer w0.25: v1@64.977,40.477 64.977,41.427 72.827,49.277 72.827,60.227 71.327,61.727 v1(71.327,68.627)
U1_7: U1.7 USBC1.A5 | length 42.5
  Top Layer w0.25: v1(61.977,40.527) USBC1.A5@61.977,46.834 ; v1(72.377,65.177) 72.767,65.567 U1.7@72.767,66.317
  Bottom Layer w0.25: v1(61.977,40.527) 62.977,39.527 67.477,39.527 68.577,40.627 68.577,44.327 73.227,48.827 73.627,48.827 73.627,63.927 v1(72.377,65.177)
U1_8: R13.1 U1.8 | length 27.4
  Top Layer w0.5: R13.1@62.474,51.078 v1(62.477,53.527) ; U1.8@73.767,66.317 73.777,66.327 v1(73.777,67.727)
  Mid-Layer 1 w0.5: v1(62.477,53.527) 62.476,64.426 65.776,67.728 v1(73.777,67.727)
U1_9: H1.2 R10.2 U1.9 | length 19.8
  Top Layer w0.5: R10.2@70.23,67.827 70.231,65.274 71.128,64.378 75.626,64.378 ; U1.9@74.767,66.316 74.767,65.236 75.626,64.378 ; H1.2@80.518,69.252 80.518,65.287 79.609,64.378 75.626,64.378
U1_10: C8.1 R3.1 U1.10 U8.13 | length 142.9
  Top Layer w0.25: C8.1@51.984,76.927 55.822,73.09 ; v1(61.627,87.027) 61.628,87.326 62.227,87.926 U8.13@62.227,88.484 ; R3.1@79.027,65.874 v1@79.728,66.577 ; v1@81.327,65.927 86.027,65.927 86.677,66.577 86.677,75.727 85.827,76.577 ; 55.822,73.09 55.933,72.978 ; 55.822,73.09 55.933,72.978 ; 55.933,72.978 68.227,72.978 ; 55.933,72.978 68.227,72.978 ; 68.227,72.978 71.826,76.577 ; 68.227,72.978 71.826,76.577 ; 71.826,76.577 85.827,76.577 ; 71.826,76.577 85.827,76.577
  Top Layer w0.5: U1.10@75.766,66.316 75.776,65.477 76.126,65.127 78.28,65.127 R3.1@79.027,65.874 ; U1.10@75.767,66.317 75.777,66.327 v1(75.777,67.577)
  Mid-Layer 1 w0.25: v1@61.628,87.027 60.876,86.277 60.876,82.127 61.427,81.576 71.427,81.576 76.528,76.478 83.876,76.478 84.526,75.828 84.527,68.627 ; v1@75.776,67.578 76.327,68.127 84.026,68.127 84.526,68.627 ; v1(79.727,66.577) 80.377,65.927 v1@81.496,65.927
  other v1: 81.496,65.927
U2_2: R1.1 R7.2 U2.2 | length 3.8
  Top Layer w0.3: R7.2@66.18,54.627 67.73,53.077 67.88,53.077 68.177,53.374 U2.2@68.177,54.427
U2_6: C1.2 C2.2 P4.1 P4.2 P4.3 R2.2 R5.2 U2.6 U2.7 U2.8 U3.3 | length 85.4
  Top Layer w0.4: U2.8@68.682,57.427 U2.7@69.177,57.427 ; U2.7@69.177,57.428 U2.6@69.677,57.428
  Top Layer w0.8: v1(68.527,64.727) 68.827,64.427 U3.3@68.827,63.628
  Top Layer w1: 46.229,68.522 46.277,68.57 46.277,71.827 ; R2.2@47.374,74.877 46.877,74.877 46.277,74.277 46.277,71.827 ; C1.2@47.734,70.027 43.227,65.52 P4.1@43.227,58.584 48.334,53.477 55.027,53.477 55.53,53.98 R5.2@55.53,55.777 ; C2.2@47.734,72.821 47.271,72.821 46.277,71.827 ; U2.7@69.177,57.426 69.177,58.576 v1(69.177,59.077) v1(69.177,59.927) v1(69.177,60.764) v1(69.177,61.627)
  Bottom Layer w1: P4.1@43.227,58.584 P4.3@43.227,63.664 ; P4.2@43.227,61.124 43.586,60.764 v1(69.177,60.764) ; 68.29,60.766 v1(69.177,61.627) ; v1(68.527,64.727) 68.527,62.277 v1(69.177,61.627) ; 68.544,60.764 68.544,59.71 v1(69.177,59.077) v1(69.177,61.627)
U2_9: R4.2 U2.9 | length 1.5
  Top Layer w0.3: R4.2@67.83,58.777 68.177,58.43 U2.9@68.177,57.427
U3_2: C3.1 L1.1 U3.2 | length 19.3
  Top Layer w0.5: C3.1@59.827,63.527 58.577,63.527 57.727,64.377 57.727,65.427 58.327,66.027 63.877,66.027 64.677,65.227 64.827,65.227 ; L1.1@64.827,69.377 64.827,65.227 ; U3.2@67.877,63.628 67.877,64.127 67.177,64.827 65.227,64.827 64.827,65.227
U3_4: R6.1 R8.1 U3.4 | length 13.6
  Top Layer w0.5: R8.1@61.477,61.324 61.83,61.677 67.627,61.677 68.527,62.577 69.527,62.577 69.727,62.777 69.727,64.858 68.827,65.758 U3.4@68.827,65.926 ; R6.1@63.777,62.544 63.777,62.443 64.543,61.677
U3_6: C3.2 U3.6 | length 12.2
  Top Layer w0.5: v1(58.527,64.927) C3.2@59.827,64.927 ; v1(66.527,66.877) 66.927,66.477 U3.6@66.927,65.926
  Bottom Layer w0.5: v1(58.527,64.927) 58.627,64.827 66.027,64.827 66.527,65.327 v1(66.527,66.877)
U6_3: C7.1 R14.2 U6.3 U8.20 | length 32.4
  Top Layer w0.24: U6.3@54.483,113.192 55.795,113.192 v1(57.584,111.404)
  Top Layer w0.25: C7.1@52.527,113.127 52.593,113.192 U6.3@54.483,113.192 53.662,113.192 52.63,114.224 R14.2@52.63,114.827 ; v1(57.577,90.434) 59.427,88.584 U8.20@59.427,88.484
  Mid-Layer 1 w0.24: v1(57.584,111.404) 57.633,111.354 57.633,110.45 ; 57.628,107.022 57.633,110.451
  Mid-Layer 1 w0.25: v1(57.577,90.434) 57.627,107.022
U6_15: R15.2 U6.15 U8.17 | length 20.7
  Top Layer w0.24: U8.17@60.627,88.484 v1(60.627,90.427) ; v1@65.883,99.104 71.866,99.104 U6.15@71.983,99.222
  Top Layer w0.25: U6.15@71.983,99.222 72.135,99.374 R15.2@73.627,99.374
  Mid-Layer 1 w0.24: v1(60.627,90.427) 65.877,95.677
  Mid-Layer 1 w0.25: 65.877,95.675 v1(65.884,99.104)
U6_24: U6.24 U8.77 | length 27.5
  Top Layer w0.24: U8.77@68.135,86.176 68.826,86.176 70.677,88.027 v1(70.677,88.377) ; v1(70.677,110.527) 71.306,110.527 71.432,110.652 U6.24@71.983,110.652
  Mid-Layer 1 w0.25: 70.671,88.022 70.677,88.028 v1(70.677,88.377) 70.67,89.676 70.67,105.799 70.677,105.806 v1(70.677,110.527)
U6_25: U6.25 U8.78 | length 30.7
  Top Layer w0.24: v1(68.483,111.904) 71.966,111.904 U6.25@71.983,111.922
  Top Layer w0.25: v1(67.127,86.577) U8.78@68.135,86.577
  Mid-Layer 1 w0.24: 68.051,111.922 v1(68.483,111.904)
  Mid-Layer 1 w0.25: v1(67.127,86.577) 67.127,90.527 67.427,90.827 67.427,107.878 67.434,111.304 ; 67.433,111.305 68.051,111.922
U8_11: P3.1 U8.11 | length 49.8
  Top Layer w0.24: U8.11@63.027,88.484 63.028,90.476 v1@63.127,90.476
  Mid-Layer 1 w0.25: v1(40.727,99.877) 40.727,115.694 P3.1@43.18,118.147 ; v1(58.477,98.577) 58.577,98.577 v1(63.177,93.977)
  Bottom Layer w0.25: v1(40.727,99.877) 41.477,99.127 57.927,99.127 v1(58.477,98.577) ; v1(63.127,90.477) 63.127,93.927 v1(63.177,93.977)
U8_12: U8.12 U9.2 | length 37.6
  Top Layer w0.24: v1(62.627,87.327) U8.12@62.627,88.484
  Bottom Layer w0.24: v1(62.627,87.327) 63.377,86.577 66.077,86.577 74.627,95.127 74.627,104.777 80.377,110.527 U9.2@83.185,110.527
U8_14: U8.14 U9.3 | length 34.6
  Top Layer w0.24: U8.14@61.827,88.484 61.827,89.877 v1(62.327,90.377)
  Bottom Layer w0.24: v1(62.327,90.377) 62.327,94.127 81.327,113.127 81.387,113.067 U9.3@83.185,113.067
U8_16: U8.16 U9.4 | length 37.4
  Top Layer w0.24: U8.16@61.027,88.484 61.027,89.977 v1(61.527,90.477)
  Bottom Layer w0.24: v1(61.527,90.477) 61.527,95.827 81.307,115.607 U9.4@83.185,115.607
U8_18: U8.18 U9.5 | length 43
  Top Layer w0.24: v1(58.527,90.427) 58.727,90.627 59.327,90.627 60.227,89.727 U8.18@60.227,88.484
  Bottom Layer w0.24: v1(58.527,90.427) 58.527,96.377 80.297,118.147 U9.5@83.185,118.147
U8_19: U8.19 USR-FLASH.1 | length 86.9
  Top Layer w0.24: v1(59.277,89.777) 59.827,89.227 U8.19@59.827,88.484
  Mid-Layer 1 w0.25: v1(72.777,95.377) 79.228,88.927 79.228,85.178 81.628,82.777 81.628,78.426 82.476,77.578 84.127,77.578 85.176,76.526 v1@85.176,71.678
  Bottom Layer w0.25: v1(59.277,89.777) 60.077,88.977 66.977,88.977 72.777,94.777 v1(72.777,95.377) ; USR-FLASH.1@72.315,46.102 74.19,44.227 79.377,44.227 82.327,47.177 84.177,47.177 85.177,48.177 v1(85.177,71.677)
U8_21: SYS-R.1 U8.21 | length 34.4
  Top Layer w0.24: v1@56.577,89.127 v1(56.577,89.119) U8.21@58.32,87.377
  Mid-Layer 1 w0.24: SYS-R.1@49.657,118.147 49.657,117.022 49.657,116.147 53.127,112.677 53.127,92.57 v1(56.577,89.119)
U8_22: P3.2 U8.22 | length 38.6
  Top Layer w0.24: v1(56.977,87.877) 57.877,86.977 U8.22@58.32,86.977
  Mid-Layer 1 w0.24: P3.2@43.18,115.607 44.254,115.607 49.047,115.607 52.476,112.178 52.476,92.376 v1(56.977,87.877)
U8_23: P3.3 U8.23 | length 37
  Top Layer w0.24: v1(56.969,86.985) 57.377,86.577 U8.23@58.32,86.577
  Mid-Layer 1 w0.24: P3.3@43.18,113.067 44.254,113.067 49.227,113.127 51.877,110.627 51.827,92.227 51.777,92.177 v1(56.969,86.985)
U8_25: P3.4 U8.25 | length 34.9
  Top Layer w0.24: v1(56.627,86.227) 57.077,85.777 U8.25@58.32,85.777
  Mid-Layer 1 w0.24: P3.4@43.18,110.527 48.503,110.527 51.176,107.854 51.026,91.827 v1(56.627,86.227)
U8_26: P3.5 U8.26 | length 30
  Top Layer w0.24: v1(55.831,85.923) 56.377,85.377 U8.26@58.32,85.377
  Mid-Layer 1 w0.24: P3.5@43.18,107.987 43.94,107.227 ; 43.757,107.41 50.328,100.839 50.328,91.426 v1@55.646,86.107
U8_27: P3.6 U8.27 | length 28.5
  Top Layer w0.24: v1(53.527,86.727) 54.177,86.727 55.927,84.977 U8.27@58.32,84.977
  Mid-Layer 1 w0.24: P3.6@43.18,105.447 43.94,104.687 49.877,98.75 49.877,90.377 v1(53.527,86.727)
U8_28: P3.7 U8.28 | length 27.1
  Top Layer w0.24: v1(57.027,84.377) 57.227,84.577 U8.28@58.32,84.577
  Mid-Layer 1 w0.24: P3.7@43.18,102.907 43.939,102.147 49.327,96.76 49.327,89.628 54.577,84.378 v1@57.028,84.378
U8_30: U8.30 X1.1 | length 10.2
  Top Layer w0.24: X1.1@50.927,82.427 51.977,83.477 51.977,85.277 54.177,85.277 55.677,83.777 U8.30@58.32,83.777
U8_31: U8.31 X1.3 | length 5.5
  Top Layer w0.24: X1.3@53.127,84.127 53.877,83.377 U8.31@58.32,83.377
U8_33: H3.1 U8.33 | length 38.2
  Top Layer w0.24: v1(56.477,82.577) U8.33@58.32,82.577
  Mid-Layer 1 w0.25: v1(49.727,67.636) 49.727,51.656 H3.1@51.562,49.821
  Bottom Layer w0.25: v1(49.727,67.636) 49.727,72.627 55.327,78.227 55.327,79.277 56.477,80.427 v1(56.477,82.577)
U8_34: H3.2 U8.34 | length 38.9
  Top Layer w0.24: v1(55.077,82.477) 55.777,81.777 56.577,81.777 56.977,82.177 U8.34@58.32,82.177
  Mid-Layer 1 w0.25: H3.2@49.022,49.821 v1(49.022,68.489)
  Bottom Layer w0.25: v1(49.022,68.489) 49.022,72.972 54.577,78.527 54.577,81.977 v1(55.077,82.477)
U8_35: RST.1 U8.35 | length 41.6
  Top Layer w0.24: v1(55.227,81.377) 56.827,81.377 56.877,81.427 57.227,81.777 U8.35@58.32,81.777
  Mid-Layer 1 w0.25: RST.1@47.677,46.737 v1(47.677,68.507) ; v1(52.177,79.327) 54.227,81.377 v1(55.227,81.377)
  Bottom Layer w0.25: v1(47.677,68.507) 47.677,74.777 v1(52.177,79.327)
U8_36: P3.8 U8.36 | length 36.2
  Top Layer w0.24: v1(55.277,80.477) 55.477,80.477 55.977,80.977 57.127,80.977 57.527,81.377 U8.36@58.32,81.377
  Mid-Layer 1 w0.24: P3.8@43.18,100.367 46.827,96.719 46.827,93.907 ; 46.827,94.024 46.827,81.827 50.729,77.926 55.275,77.926 v1(55.277,80.477)
U8_37: P3.9 U8.37 | length 37.5
  Top Layer w0.24: U8.37@58.32,80.977 v1(59.127,80.977)
  Mid-Layer 1 w0.24: P3.9@43.18,97.827 44.478,97.827 45.977,96.326 45.977,81.977 50.477,77.476 55.728,77.476 55.728,79.778 56.027,80.077 56.027,80.928 56.678,81.576 58.778,81.576 59.126,81.228 v1@59.126,80.976
U8_38: P3.10 U8.38 | length 32.5
  Top Layer w0.24: v1(56.427,79.327) 56.427,80.027 56.977,80.577 U8.38@58.32,80.577
  Mid-Layer 1 w0.24: P3.10@43.18,95.287 45.428,93.039 45.428,88.599 45.428,81.876 50.376,76.928 56.177,76.928 56.426,77.177 v1@56.426,79.328
U8_39: P3.11 U8.39 | length 30.7
  Top Layer w0.24: v1(57.027,78.527) 57.077,78.577 57.077,79.627 57.627,80.177 U8.39@58.32,80.177
  Mid-Layer 1 w0.24: P3.11@43.18,92.747 44.976,90.951 44.976,85.627 45.027,81.627 50.277,76.377 56.878,76.377 56.878,78.378 v1(57.027,78.527)
U8_40: P3.12 U8.40 | length 28.8
  Top Layer w0.24: U8.40@58.32,79.777 v1@58.326,79.026
  Mid-Layer 1 w0.24: P3.12@43.18,90.207 44.427,88.96 44.427,81.327 44.577,81.327 49.977,75.927 57.328,75.927 57.328,77.177 58.318,78.17 v1(58.327,79.027)